# EAGLE board Project1 (EAGLE 7.6.0)

Size 73.58 x 215.79 mm. Coordinates in mm from the lower left corner, seen from the top.
Outline: 0,0 56.82,0 56.82,53.33 0,53.33 0,0
Copper layers (1*16): Top 0.035mm / dielectric 1.5mm / Bottom 0.035mm
Design rules "default": minimum track width 10mil, minimum drill 24mil, track to track 8mil, track to pad 8mil, pad to pad 8mil, via to via 8mil, smd to smd 8mil, copper to edge 40mil, drill to drill 8mil, minimum pad ring 10mil, minimum via ring 8mil, stop-mask expansion 4mil, vias tented up to drill 0mil, thermal gap 10mil

## Footprints (pad centres in the part's own frame; a part is rotated, then mirrored left to right if it is on the bottom)
LED5MM = drill 0.813 octagon: A -1.27,0; K 1.27,0
0207/10 = drill 0.813 octagon: 1 -5.08,0; 2 5.08,0
TL1105 = drill 1 pad 1.676: 1 -2.25,3.25; 2 2.25,3.25; 3 -2.25,-3.25; 4 2.25,-3.25
ARDUINO_UNO = drill 1.016 pad 1.88: 0 63.5,50.8; 1 60.96,50.8; 2 58.42,50.8; 3 55.88,50.8; 3.3V 35.56,2.54; 4 53.34,50.8; 5 50.8,50.8; 5V 38.1,2.54; 6 48.26,50.8; 7 45.72,50.8; 8 41.656,50.8; 9 39.116,50.8; 10 36.576,50.8; 11 34.036,50.8; 12 31.496,50.8; 13 28.956,50.8; A0 50.8,2.54; A1 53.34,2.54; A2 55.88,2.54; A3 58.42,2.54; A4 60.96,2.54; A5 63.5,2.54; AREF 23.876,50.8; GND 26.416,50.8; GND. 43.18,2.54; GND.. 40.64,2.54; I/OREF 30.48,2.54; N/C 27.94,2.54; RESET 33.02,2.54; SCL 18.796,50.8; SDA 21.336,50.8; VIN 45.72,2.54 | hole 3.2: 66.04,7.62; 66.04,35.56; 15.24,50.8; 13.97,2.54

## Placement (x,y rotation side)
D1  [LED5MM]  5,22.78 0 top
D2  [LED5MM]  5,73.58 0 top
D3  [LED5MM]  5,111.68 0 top
D4  [LED5MM]  5,175.18 0 top
R1  1k‎Ω  [0207/10]  5,35.48 0 top
R2  1k‎Ω  [0207/10]  5,98.98 0 top
R3  1k‎Ω  [0207/10]  5,149.78 0 top
R4  1k‎Ω  [0207/10]  5,213.28 0 top
S1  [TL1105]  5,86.28 0 top
S2  [TL1105]  5,124.38 0 top
S3  [TL1105]  5,137.08 0 top
S4  [TL1105]  5,187.88 0 top
S5  [TL1105]  5,200.58 0 top
U1  [ARDUINO_UNO]  5,10.08 0 top
U2  [ARDUINO_UNO]  5,48.18 0 top
U3  [ARDUINO_UNO]  5,60.88 0 top
U4  [ARDUINO_UNO]  5,162.48 0 top

## Library data of the parts
D1-D4 R1-R4 S1-S5 U1-U4 = AUTODESK_CIRCUITS_BREADBOARD

## Nets
N$1: R1.1 U1.5V
N$2: D1.K U1.GND..
N$3: D1.A R1.2
N$4: D2.K U2.GND..
N$5: D2.A S1.3
N$6: R2.2 S1.4
N$7: S1.2
N$8: S1.1
N$9: R2.1 U2.5V
N$10: R3.1 U3.5V
N$11: D3.K U3.GND..
N$12: D3.A S2.3
N$13: S2.4 S3.3
N$14: S2.2
N$15: S2.1
N$16: R3.2 S3.4
N$17: S3.2
N$18: S3.1
N$19: D4.K U4.GND..
N$20: D4.A S4.3 S5.3
N$21: S4.2
N$22: S4.1
N$23: S5.2
N$24: S5.1
N$25: R4.1 U4.5V
N$26: R4.2 S4.4 S5.4

## Tracks (layer width: path | path; a pad name or v marks a point on that pad's centre or on a via)
N$1  (1 unrouted)
N$2  (1 unrouted)
N$3  (1 unrouted)
N$4  (1 unrouted)
N$5  (1 unrouted)
N$6  (1 unrouted)
N$9  (1 unrouted)
N$10  (1 unrouted)
N$11  (1 unrouted)
N$12  (1 unrouted)
N$13  (1 unrouted)
N$16  (1 unrouted)
N$19  (1 unrouted)
N$20  (2 unrouted)
N$25  (1 unrouted)
N$26  (2 unrouted)